# Altium PCB Swarm.PcbDoc
Units mil, origin at the board's own origin, x right, y up, seen from the top; angles counter-clockwise.
Board outline 3937.01 x 3937.01 mil, 2 copper layers (Top Layer, Bottom Layer); 20 components, 41 nets, 214 pads, 29 vias.
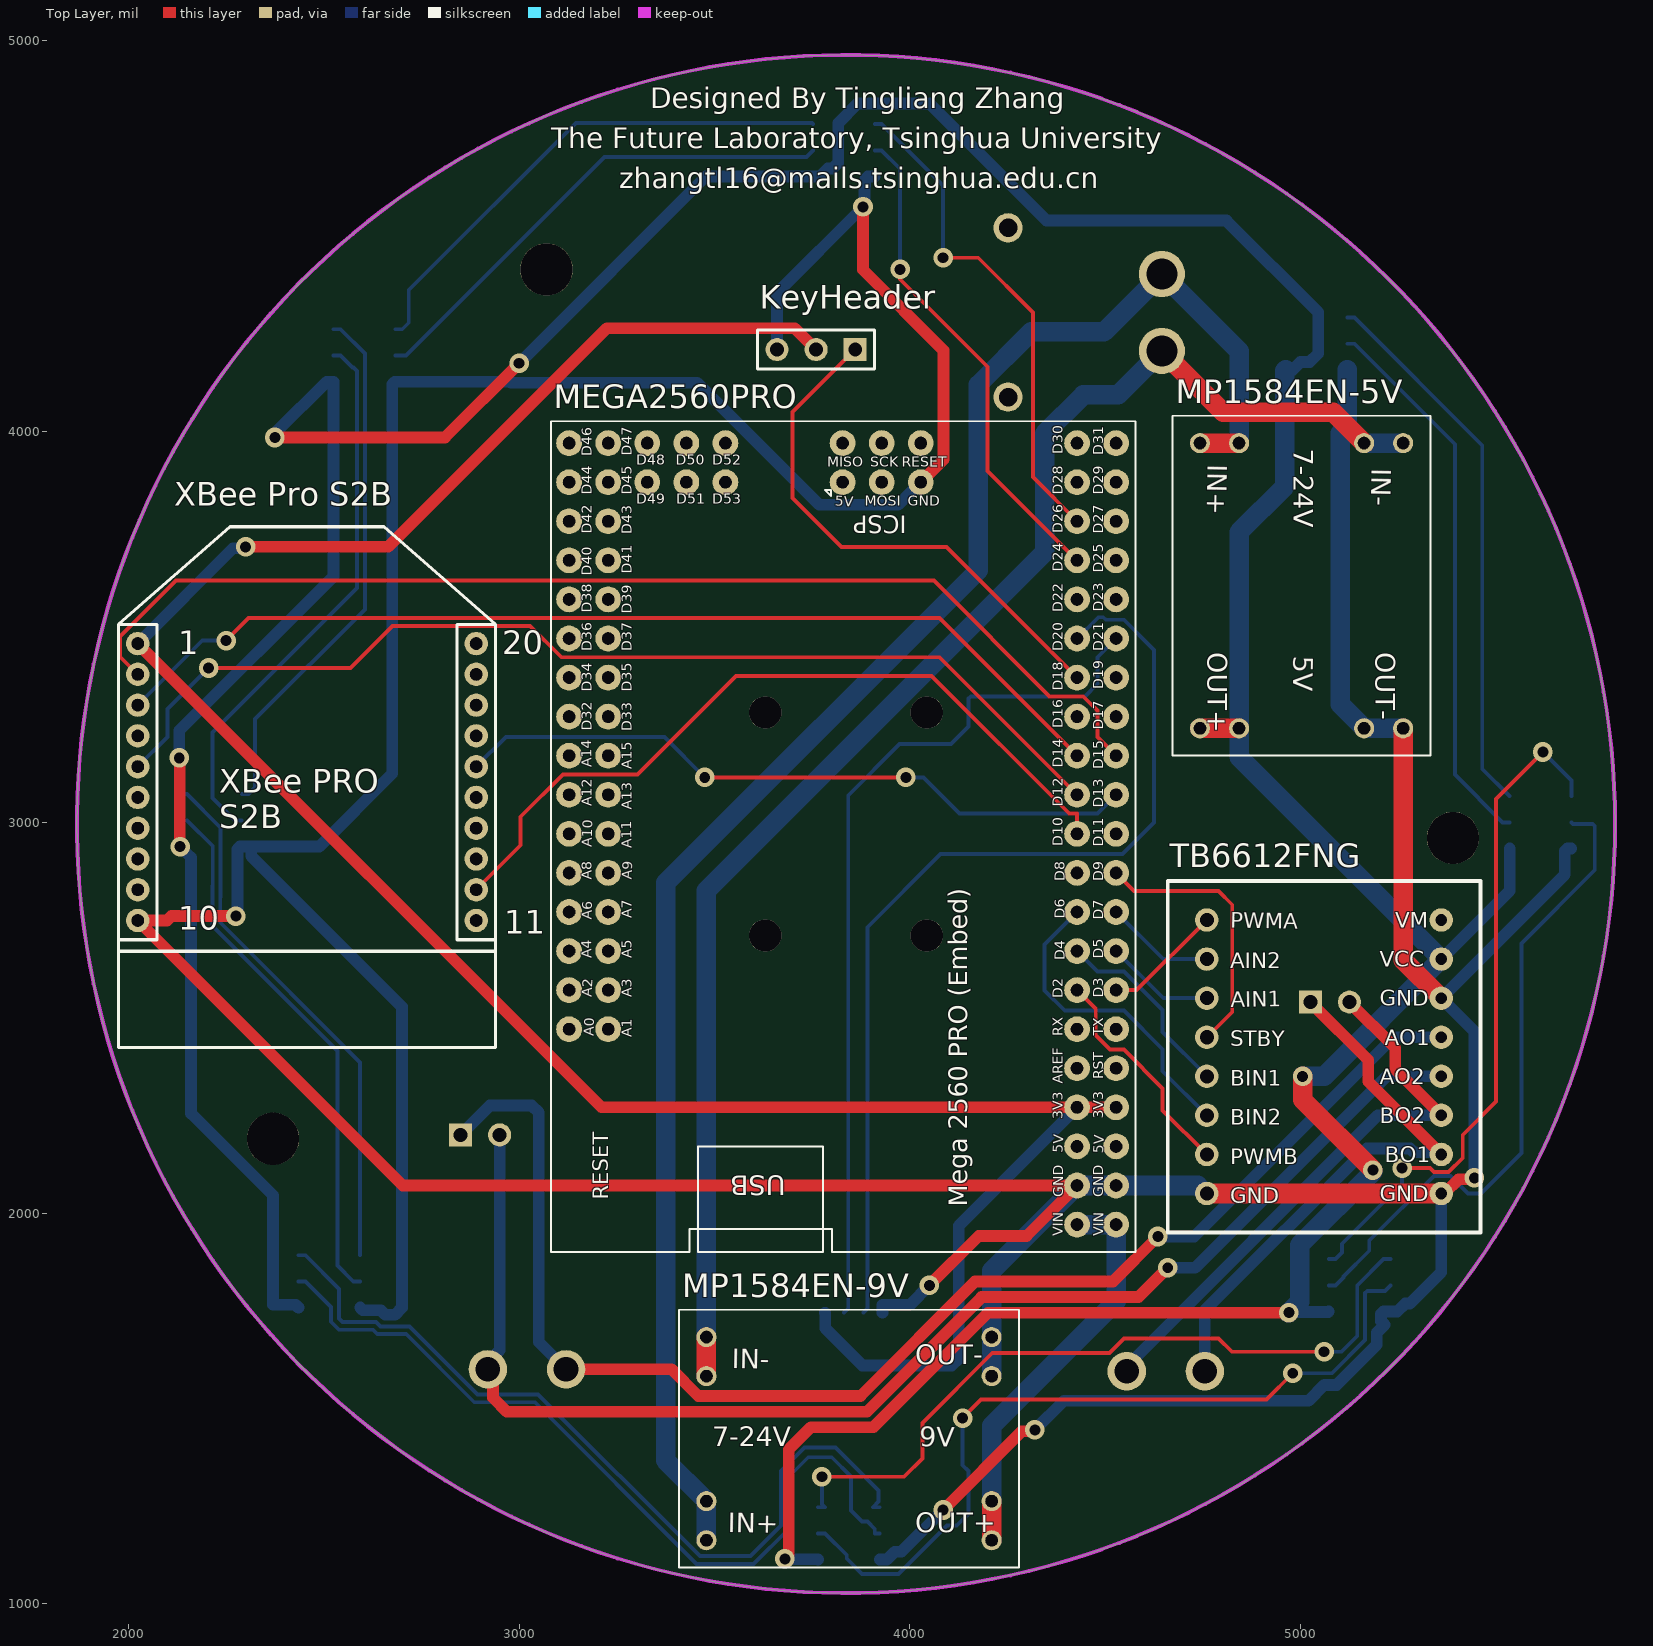
[diagram p0: Top Layer view]
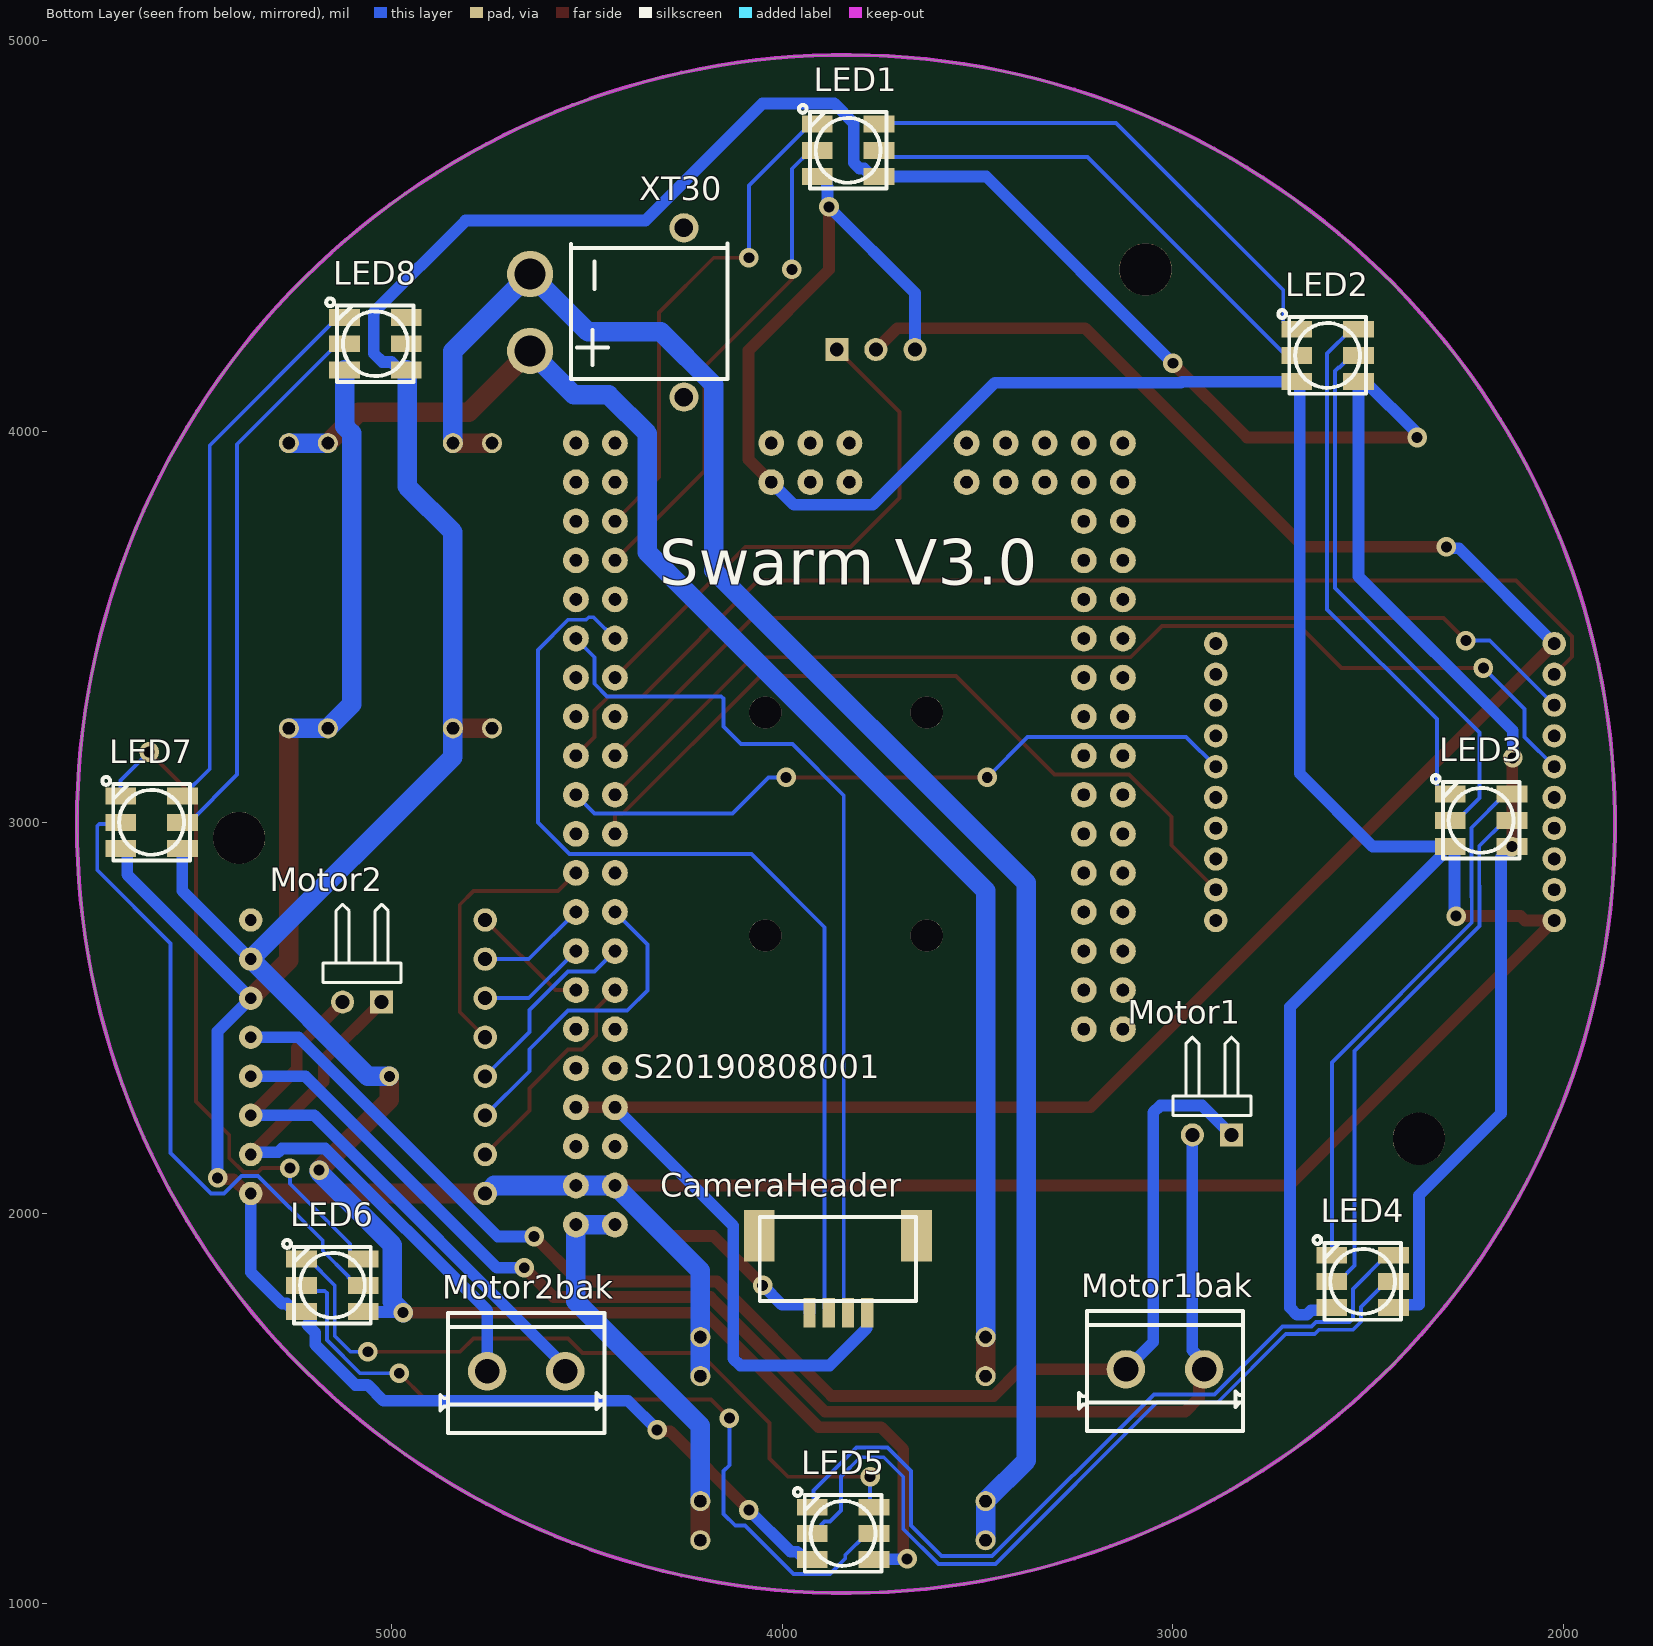
[diagram p1: Bottom Layer view, seen from below]

## Layer stack, top to bottom
Top Solder: solder mask 0.4, Solder Resist, Dk 3.5
Top Layer: signal copper 1.4
Dielectric 1: dielectric 12.6, FR-4, Dk 4.8
Bottom Layer: signal copper 1.4
Bottom Solder: solder mask 0.4, Solder Resist, Dk 3.5

## Board outline
1868.01,2995.74 cw(c3836.52,2995.74) 3836.52,4964.24 cw(c3836.52,2995.74) 5805.02,2995.74 cw(c3836.52,2995.74) 3836.52,1027.23 cw(c3836.52,2995.74)

## Design rules (kind name [scope] priority, off if disabled: settings)
Clearance [All] p1: gap=10 ignorepadtopadclearanceinfootprint=FALSE except(0: Arc-Hole Track-Hole SMDPad-Hole THPad-Hole Via-Hole Fill-Hole Poly-Hole Region-Hole Text-Hole)
PolygonConnect [All] p1: connectstyle=Relief reliefconductorwidth=10 reliefentries=4 polygonreliefangle="90 Angle" airgapwidth=10
RoutingVias [All] p1: holewidth=28 width=50 viastyle="Through Hole" minholewidth=28 minwidth=50 maxholewidth=28 maxwidth=50
SolderMaskExpansion [All] p1: expansion=4
Width [All] p1: maxlimit=50 minlimit=10 preferedwidth=10 minimp=50.000000 maximp=50.000000 favimp=50.000000
30 further rules are at their usual default settings.

## Components (designator, comment, footprint, x,y, rotation, side; value= is the part's Value field where it differs from the comment)
CameraHeader "CameraHeader" CameraHeader 3857.36,1890 r0 bottom
KeyHeader "Header 3" HDR1X3 3860,4210 r180 top
LED1 "APA1025050" APA102_5050 7831,7720 r180 bottom
LED2 "APA1025050" APA102_5050 6604,7195 r180 bottom
LED3 "APA1025050" APA102_5050 6211,6005 r180 bottom
LED4 "APA1025050" APA102_5050 6514,4825 r180 bottom
LED5 "APA1025050" APA102_5050 7844,4180 r180 bottom
LED6 "APA1025050" APA102_5050 9151,4815 r180 bottom
LED7 "APA1025050" APA102_5050 9614,6000 r180 bottom
LED8 "APA1025050" APA102_5050 9041,7225 r180 bottom
MEGA2560PRO "MEGA2560PROE" MEGA2560PRO 3836.52,2995.74 r90 top
Motor1 "Header 2H" HDR1X2H 2850,2200 r0 bottom
Motor1bak "DB126V-5.0-2P" CONN-TH_2PIN-V-PITCH5.00-L_JL126-50002G01 3020,1600 r180 bottom
Motor2 "Header 2H" HDR1X2H 5025,2540 r0 bottom
Motor2bak "DB126V-5.0-2P" CONN-TH_2PIN-V-PITCH5.00-L_JL126-50002G01 4655,1595 r180 bottom
MP1584EN-5V "MP1584EN非隔离降压" MP1584_DC 5000,3595 r270 top
MP1584EN-9V "MP1584EN非隔离降压" MP1584_DC 3855,1420 r0 top
TB6612FNG "TB6612FNG" TB6612FNG 5060,2400 r0 top
"XBee Pro S2B" "XBee Pro S2B" XBEE-1 2456.93,2670.08 r0 top
XT30 "xt30" "XT30 GONG" 4645,4305 r270 bottom

## Footprints (in the part's own frame and the unit in brackets; to place one, negate y for a bottom-side part, rotate by r counter-clockwise, add the part's x,y. Pads: shape width x height; smd on the part's side, far side on the other; paste and mask are expansions set on the pad)
APA102_5050 [mil]
  rect 78.7x43.3 smd: 1(4079,-3067) 2(4079,-3000) 3(4079,-2933) 4(3921,-2933) 5(3921,-3000) 6(3921,-3067)
  silkscreen extent 3874,-3098 4098,-2884
CameraHeader [mm]
  rect 2x3.35 smd: 0(-5.105,-1.317) 0(5.105,-1.317)
  rect 0.8x1.9 smd: 1(-1.905,3.683) 2(-0.655,3.683) 3(0.595,3.683) 4(1.845,3.683)
  silkscreen extent -5.08,-2.54 5.08,2.92
CONN-TH_2PIN-V-PITCH5.00-L_JL126-50002G01 [mm]
  round 2.5 hole 1.6: 1(-2.54,0) 2(2.54,0)
  silkscreen extent -5.59,-4 5.08,3.8
HDR1X2H [mm] "Connector; Header; 2 Position; Right Angle"
  rect 1.5x1.5 hole 0.9: 1(0,0)
  round 1.5 hole 0.9: 2(2.54,0)
  silkscreen extent -1.27,-6.35 3.81,-1.27
HDR1X3 [mm] "Connector; Header; 3 Position"
  rect 1.5x1.5 hole 0.9: 1(0,0)
  round 1.5 hole 0.9: 2(2.54,0) 3(5.08,0)
  silkscreen extent -1.27,-1.27 6.35,1.27
MEGA2560PRO [mil]
  round 66 hole 31.5 slot 31.7 at 0 deg: 3V3@1(-725.2,-691.34) 3V3@2(-725.2,-591.34) 5V@1(-825.2,-691.34) 5V@2(-825.2,-591.34) 5V@3(874.8,8.66) A0(-525.2,708.66) A1(-525.2,608.66) A2(-425.2,708.66) A3(-425.2,608.66) A4(-325.2,708.66) A5(-325.2,608.66) A6(-225.2,708.66) A7(-225.2,608.66) A8(-125.2,708.66) A9(-125.2,608.66) A10(-25.2,708.66) A11(-25.2,608.66) A12(74.8,708.66) A13(74.8,608.66) A14(174.8,708.66) A15(174.8,608.66) AREF(-625.2,-591.34) D2(-425.2,-591.34) D3(-425.2,-691.34) D4(-325.2,-591.34) D5(-325.2,-691.34) D6(-225.2,-591.34) D7(-225.2,-691.34) D8(-125.2,-591.34) D9(-125.2,-691.34) D10(-25.2,-591.34) D11(-25.2,-691.34) D12(74.8,-591.34) D13(74.8,-691.34) D14(174.8,-591.34) D15(174.8,-691.34) D16(274.8,-591.34) D17(274.8,-691.34) D18(374.8,-591.34) D19(374.8,-691.34) D20(474.8,-591.34) D21(474.8,-691.34) D22(574.8,-591.34) D23(574.8,-691.34) D24(674.8,-591.34) D25(674.8,-691.34) D26(774.8,-591.34) D27(774.8,-691.34) D28(874.8,-591.34) D29(874.8,-691.34) D30(974.8,-591.34) D31(974.8,-691.34) D32(274.8,708.66) D33(274.8,608.66) D34(374.8,708.66) D35(374.8,608.66) D36(474.8,708.66) D37(474.8,608.66) D38(574.8,708.66) D39(574.8,608.66) D40(674.8,708.66) D41(674.8,608.66) D42(774.8,708.66) D43(774.8,608.66) D44(874.8,708.66) D45(874.8,608.66) D46(974.8,708.66) D47(974.8,608.66) D48(974.8,508.66) D49(874.8,508.66) D50(974.8,408.66) D51(874.8,408.66) D52(974.8,308.66) D53(874.8,308.66) GND@1(-925.2,-691.34) GND@2(-925.2,-591.34) GND@3(874.8,-191.34) MISO(974.8,8.66) MOSI(874.8,-91.34) RESET(974.8,-191.34) RST(-625.2,-691.34) RX(-525.2,-591.34) SCK(974.8,-91.34) TX(-525.2,-691.34) VIN@1(-1025.19,-691.34) VIN@2(-1025.19,-591.34)
  silkscreen extent -1095,-741 1031,755
MP1584_DC [mil]
  round 51.5 hole 31.5 slot 31.7 at 0 deg: IN+(-375.67,-157.48) IN+@1(-375.67,-257.48) IN-(-375.67,262.52) IN-@1(-375.67,162.52) OUT+(354.33,-257.48) OUT+@1(354.33,-157.48) OUT-(354.33,262.52) OUT-@1(354.33,162.52)
  silkscreen extent -446,-327 424,333
TB6612FNG [mil]
  round 60 hole 36: 1(-300,350) 2(-300,250) 3(-300,150) 4(-300,50) 5(-300,-50) 6(-300,-150) 7(-300,-250) 8(-300,-350)
  round 60 hole 30: 9(300,-350) 10(300,-250) 11(300,-150) 12(300,-50) 13(300,50) 14(300,150) 15(300,250) 16(300,350)
  silkscreen extent -400,-450 400,450
XBEE-1 [mil]
  round 60 hole 31.5 slot 31.7 at 0 deg: 1(-433.07,787.4) 2(-433.07,708.66) 3(-433.07,629.92) 4(-433.07,551.18) 5(-433.07,472.44) 6(-433.07,393.7) 7(-433.07,314.96) 8(-433.07,236.22) 9(-433.07,157.48) 10(-433.07,78.74) 11(433.07,78.74) 12(433.07,157.48) 13(433.07,236.22) 14(433.07,314.96) 15(433.07,393.7) 16(433.07,472.44) 17(433.07,551.18) 18(433.07,629.92) 19(433.07,708.66) 20(433.07,787.4)
  silkscreen extent -482,-246 482,1087
"XT30 GONG" [mm]
  round 3 hole 2: 1(-2.5,0) 2(2.5,0)
  round 1.9 hole 1.2: 3(5.5,10) 4(-5.5,10)
  silkscreen extent -4.5,2.67 4.32,12.83

## Part data
CameraHeader: library part Component_1
KeyHeader: "Header, 3-Pin", LatestRevisionDate=17-Jul-2002, LatestRevisionNote="Re-released for DXP Platform.", Publisher="Altium Limited"
MEGA2560PRO: library part "MEGA2560PROE copy", Contributor=westcowboy, spicePre=M
Motor1 Motor2: "Header, 2-Pin, Right Angle", LatestRevisionDate=17-Jul-2002, LatestRevisionNote="Re-released for DXP Platform.", Publisher="Altium Limited"
Motor1bak Motor2bak: BOM_Manufacturer=DIBO, BOM_Manufacturer Part=DB126V-5.0-2P, BOM_Supplier=LCSC, BOM_Supplier Part=C395849, Contributor=LCSC, spicePre=U
"XBee Pro S2B": library part XBEE-1B1, Contributor=niudvb, spicePre=?
LED1 LED2 LED3 LED4 LED5 LED6 LED7 LED8: spicePre=U
MP1584EN-5V MP1584EN-9V: Contributor=zuwenz, spicePre=D
TB6612FNG: Contributor=Lwj.bf, sourceId=YsmgyP7pj, spicePre=U, timeStamp=1453691199
XT30: Contributor=Weiwww, spicePre=U

## Free pads (board coordinates)
  round 82.68 hole 82.68: 1(3629.82,2710.3) 1(3629.82,3281.17) 1(4043.21,2710.3) 1(4043.21,3281.17)
  round 133.86 hole 133.86: M3(2370,2190) M3(3070,4415) M3(5390,2960)

## Via types
v1: diameter 50, hole 28, Top Layer to Bottom Layer, 29 vias

## Nets (pads, with @x,y where several pads share a name; then routed paths per layer and width w, separated by ;. In a path a pad name is that pad's centre, name@x,y a point inside that pad or via, vN(x,y) a via of type N, cw(c..) or ccw(c..) an arc to the next point about the centre after c; other vN are vias at no path point)
+5: LED1.1 LED2.1 LED3.1 LED4.1 LED5.1 LED6.1 LED7.1 LED8.1 MP1584EN-5V.OUT+ MP1584EN-5V.OUT+@1 TB6612FNG.15 | length 11791.8
  Top Layer w30: v1(2130,3165) 2131,3164 2131,2939 v1(2132,2938) ; v1(2375,3985) 2810,3985 v1(3000,4175) ; v1(3680,1115) 3690,1125 3690,1395 3746.77,1451.77 3906.81,1451.77 4200.04,1745 v1(4970,1745)
  Top Layer w50: MP1584EN-5V.OUT+ 4842.52,3240.67 ; v1(5005,2350) 5005,2290 v1(5185,2110)
  Bottom Layer w30: v1(2130,3165) 2130,3235 2525,3630 LED2.1 2507.3,4128 2378.83,3999.53 2378.83,3988.83 v1(2375,3985) ; v1(2132,2938) 2160,2910 2160,2255 2370,2045 2370,1765 2428,1765 LED4.1 ; v1(3000,4175) 2999.92,4175.08 3477.85,4653 LED1.1 3769.7,4653 3790.05,4673.35 3801.71,4673.35 3816.35,4687.99 3816.35,4789.71 3866.64,4840 4050,4840 4349.82,4540.18 4810.17,4540.18 5045,4305.36 5045,4200 5023.35,4178.35 5000.05,4178.35 4979.7,4158 LED8.1 ; v1(3680,1115) 3681,1114 3764,1114 LED5.1 ; v1@4971.5,1746.5 5070.5,1746.5 LED6.1 ; TB6612FNG.15 5535,2825 LED7.1
  Bottom Layer w50: LED8.1 4960,4156 4960,3860 4842.52,3742.52 4842.52,3240.67 4842.81,3240.38 4842.81,3167.19 TB6612FNG.15 5060,2350 v1(5005,2350) ; v1(4970,1745) 4971.5,1746.5 4997.65,1772.65 4997.65,1918.15 5185,2105.5 v1(5185,2110)
AIN1: MEGA2560PRO.D5 TB6612FNG.3 | length 282.1
  Bottom Layer w10: MEGA2560PRO.D5 4648.39,2550 TB6612FNG.3
AIN2: MEGA2560PRO.D7 TB6612FNG.2 | length 282.1
  Bottom Layer w10: MEGA2560PRO.D7 4648.39,2650 TB6612FNG.2
AO1: Motor1.1 Motor1bak.1 TB6612FNG.13 | length 3573.4
  Top Layer w30: Motor1bak.1 3390.08,1600 3458.31,1531.77 3873.67,1531.77 4166.9,1825 4520,1825 v1(4635,1940)
  Bottom Layer w30: Motor1.1 2925,2275 3032.43,2275 3050,2257.43 3050,1670 Motor1bak.1 ; v1(4635,1940) 4727.78,1940 5237.78,2450 TB6612FNG.13
AO2: Motor1.2 Motor1bak.2 TB6612FNG.12 | length 3487.9
  Top Layer w30: Motor1bak.2 2933.09,1586.91 2933.09,1526.91 2968.23,1491.77 3890.24,1491.77 4183.47,1785 4585,1785 v1(4660,1860)
  Bottom Layer w30: Motor1bak.2 2920,1618.52 2950,1648.52 Motor1.2 ; v1(4660,1860) 4730,1860 5220,2350 TB6612FNG.12
BIN1: MEGA2560PRO.D4 TB6612FNG.5 | length 497.9
  Bottom Layer w10: MEGA2560PRO.D4 4479.86,2618.54 4547.74,2618.54 4647.09,2519.19 4647.09,2462.91 TB6612FNG.5
BIN2: MEGA2560PRO.D6 TB6612FNG.6 | length 815.4
  Bottom Layer w10: MEGA2560PRO.D6 4345,2687.68 4345,2570 4396.46,2518.54 4547.74,2518.54 4647.09,2419.19 4647.09,2362.91 TB6612FNG.6
BO1: Motor2.1 Motor2bak.1 TB6612FNG.10 | length 1467.3
  Top Layer w30: Motor2.1 5173.25,2391.75 5173.25,2336.75 TB6612FNG.10
  Bottom Layer w30: Motor2bak.1 4755,1750.71 5169.29,2165 5280.71,2165 5289.97,2155.74 5354.26,2155.74 TB6612FNG.10
BO2: Motor2.2 Motor2bak.2 TB6612FNG.11 | length 1470.8
  Top Layer w30: Motor2.2 5242.41,2422.59 5242.41,2367.59 TB6612FNG.11
  Bottom Layer w30: Motor2bak.2 4555,1607.28 5197.72,2250 TB6612FNG.11
GND: "XBee Pro S2B.10" CameraHeader.4 KeyHeader.3 LED1.6 LED2.6 LED3.6 LED4.6 LED5.6 LED6.6 LED7.6 LED8.6 MEGA2560PRO.GND@1 MEGA2560PRO.GND@2 MEGA2560PRO.GND@3 MP1584EN-5V.OUT- MP1584EN-5V.OUT-@1 MP1584EN-9V.OUT- MP1584EN-9V.OUT-@1 TB6612FNG.8 TB6612FNG.9 TB6612FNG.14 | length 15990.9
  Top Layer w30: v1(2275,2760) 2110.04,2760 2098.86,2748.82 2023.86,2748.82 2702.14,2070.54 4427.86,2070.54 4298.56,1941.24 4176.24,1941.24 v1(4050,1815) ; v1(3880,4575) 3880,4414.29 4085.86,4208.43 4085.86,3928.54 4027.86,3870.54 ; v1(4085,1240) 4286.17,1441.17 4316.17,1441.17 v1(4320,1445) ; TB6612FNG.9 5368.12,2050 5404.29,2086.17 5441.17,2086.17 v1(5445,2090)
  Top Layer w50: TB6612FNG.8 TB6612FNG.9 ; MP1584EN-5V.OUT- 5262.52,2647.48 TB6612FNG.14
  Bottom Layer w30: v1(2275,2760) 2278.83,2763.83 2278.83,2931.35 2285.48,2938 LED3.6 LED3.6@2307.7,2938 ; LED4.6 2599.65,1751.35 2646.22,1751.35 2657.57,1740 2682.43,1740 2700,1757.57 2700,2528 2314.35,2913.65 2314.35,2931.35 LED3.6@2307.7,2938 ; KeyHeader.3 3660,4355 v1(3880,4575) 3883.83,4578.83 3883.83,4626.83 3885.65,4628.65 3885.65,4646.35 3892.3,4653 LED1.6 ; LED5.6 3940.7,1113 3961.05,1133.35 3978.35,1133.35 v1(4085,1240) ; CameraHeader.4 3930,1764.75 3930.75,1765.5 4000.5,1765.5 v1(4050,1815) ; 4027.86,3870.54 3969.86,3812.54 3767.88,3812.54 3455.42,4125 2979.29,4125 2976.29,4128 LED2.6 2681.65,4128 2675,4121.35 2675,3125 2488,2938 LED3.6@2307.7,2938 ; v1(4320,1445) 4394.41,1519.41 5020.42,1519.41 5061.01,1560 5092.43,1560 5195,1662.57 5195,1693.99 5215,1713.99 5205.65,1723.34 5205.65,1741.35 5212.3,1748 LED6.6 5247.7,1748 5268.05,1768.35 5279.71,1768.35 5360,1848.64 TB6612FNG.9 ; v1(5445,2090) 5445,2465 TB6612FNG.14 5676.35,2866.35 5676.35,2926.35 5683,2933 LED7.6
  Bottom Layer w50: 4209.33,1582.52 MP1584EN-9V.OUT- 4209.33,1852.01 4427.86,2070.54 4527.86,2070.54 4736.76,2070.54 4757.29,2050 TB6612FNG.8 ; LED8.6 5120,4014.06 5101.77,3995.83 5101.77,3301.83 5162.52,3241.08 5162.52,3240.67 MP1584EN-5V.OUT-
Key: KeyHeader.1 MEGA2560PRO.D18 | length 1364.4
  Top Layer w10: KeyHeader.1 3700,4050 3700,3830 3825,3705 4093.39,3705 MEGA2560PRO.D18
MOSI: LED1.4 MEGA2560PRO.D26 | length 1294.1
  Top Layer w10: v1(4085,4445) 4175,4445 4315,4305 4315,3883.39 MEGA2560PRO.D26
  Bottom Layer w10: LED1.4 3927.7,4787 4085,4629.7 v1(4085,4445)
NetLED1_2: LED1.2 LED2.5 | length 1286.5
  Bottom Layer w10: LED2.5 2710,4195 3218.35,4703.35 3735.35,4703.35 LED1.2
NetLED1_3: LED1.3 LED2.4 | length 1338
  Bottom Layer w10: LED2.4 2700.7,4262 2717.35,4278.65 2717.35,4362.35 3145,4790 3749,4790 LED1.3
NetLED2_2: LED2.2 LED3.5 | length 1421.3
  Bottom Layer w10: LED3.5 2272.3,3005 2215,3062.3 2215,3230 2585,3600 2585,4155 2575.79,4164.21 2573.49,4164.21 2542.7,4195 LED2.2
NetLED2_3: LED2.3 LED3.4 | length 1374.4
  Bottom Layer w10: LED3.4 2307.7,3072 2324.35,3088.65 2324.35,3264.35 2605,3545 2605,4199.7 2542.7,4262 LED2.3
NetLED3_2: LED3.2 LED4.5 | length 1392.2
  Bottom Layer w10: LED3.2 2149.7,3005 2215.65,2939.05 2215.65,2837.42 2215,2836.77 2215,2735.15 2535,2415.15 2535,1865.3 2575.3,1825 LED4.5
NetLED3_3: LED3.3 LED4.4 | length 1381.9
  Bottom Layer w10: LED3.3 2149.7,3072 2235.65,2986.05 2235.65,2809.22 2235,2808.57 2235,2743.43 2593,2385.43 LED4.4
NetLED4_2: LED4.2 LED5.5 | length 2139.2
  Bottom Layer w10: LED4.2 2452.7,1825 2518.65,1759.05 2518.65,1721.85 2539.15,1701.35 2625.51,1701.35 2636.86,1690 2710.91,1690 2885.12,1515.79 3040.15,1515.79 3454.17,1101.77 3600.05,1101.77 3690,1191.72 3690,1325 3740,1375 3800,1375 3849.61,1325.39 3849.61,1238.18 3877.44,1210.35 3891.22,1210.35 3910,1191.57 3910,1180 LED5.5
NetLED4_3: LED4.3 LED5.4 | length 2158.1
  Bottom Layer w10: LED4.3 2452.7,1892 2538.65,1806.05 2538.65,1730.14 2547.44,1721.35 2633.8,1721.35 2645.15,1710 2719.19,1710 2893.4,1535.79 3048.43,1535.79 3462.45,1121.77 3591.77,1121.77 3670,1200 3670,1340 3730,1400 3810,1400 3920,1290 3920,1261.7 3905.3,1247 LED5.4
NetLED5_2: LED5.2 LED6.5 | length 2054.1
  Top Layer w10: v1(4135,1475) 4182.5,1522.5 4912.5,1522.5 v1(4980,1590)
  Bottom Layer w10: LED5.2 3782.7,1180 3838.39,1124.31 3838.39,1115.39 3877.44,1076.35 3971.35,1076.35 4095,1200 4120,1200 4150,1230 4150,1339.59 4135,1354.59 v1(4135,1475) ; v1(4980,1590) 5080,1590 5165,1675 5165,1795 5170.86,1800.86 5215.86,1800.86 LED6.5
NetLED5_3: LED5.3 LED6.4 | length 1942.1
  Top Layer w10: v1(3775,1325) 3985,1325 4031.8,1371.8 4031.8,1462.62 4210.95,1641.77 4510.96,1641.77 4548.4,1679.21 4789.88,1679.21 4824.09,1645 v1(5060,1645)
  Bottom Layer w10: LED5.3 3782.7,1247 3775,1254.7 v1(3775,1325) ; v1(5060,1645) 5105,1645 5145,1685 5145,1814.7 5212.3,1882 LED6.4
NetLED6_2: LED6.2 LED7.5 | length 1665.9
  Bottom Layer w10: LED6.2 5089.7,1815 5109.79,1835.09 5109.79,1837.58 5175.65,1903.44 5175.65,1929.29 5341.36,2095 5383.43,2095 5428.43,2050 5461.57,2050 5565,2153.43 5565,2690 5753,2878 5753,2990.37 5747.35,2996.02 5696.98,2996.02 LED7.5
NetLED6_3: LED6.3 LED7.4 | length 1762.2
  Top Layer w10: v1(5260,2115) 5331.36,2115 5341.36,2105 5378.64,2105 5415,2141.36 5415,2200 5500,2285 5500,3060 v1(5620,3180)
  Bottom Layer w10: LED6.3 5089.7,1882 5106.35,1898.65 5106.35,1921.35 5260,2075 v1(5260,2115) ; v1(5620,3180) 5693,3107 LED7.4
NetLED7_2: LED7.2 LED8.5 | length 1417.6
  Bottom Layer w10: LED8.5 5137.7,4225 5395,3967.7 5395,3122.3 5517.3,3000 LED7.2
NetLED7_3: LED7.3 LED8.4 | length 1407.3
  Bottom Layer w10: LED8.4 5137.7,4292 5465,3964.7 5465,3137 LED7.3
NetMP1584EN-5V_IN+: MP1584EN-5V.IN+ MP1584EN-5V.IN+@1 MP1584EN-9V.IN+ MP1584EN-9V.IN+@1 XT30.1 | length 4534
  Top Layer w50: 4742.52,3970.67 MP1584EN-5V.IN+
  Bottom Layer w50: 3479.33,1162.52 MP1584EN-9V.IN+ 3375,1366.85 3375,2845 4175,3645 4175,4120 4310.19,4255.19 4496.77,4255.19 XT30.1 4842.52,4205.9 MP1584EN-5V.IN+
NetMP1584EN-5V_IN-: MP1584EN-5V.IN- MP1584EN-5V.IN-@1 MP1584EN-9V.IN- MP1584EN-9V.IN-@1 XT30.2 | length 3873.9
  Top Layer w50: 3479.33,1582.52 MP1584EN-9V.IN- ; XT30.2 4801.57,4050 5083.19,4050 5162.52,3970.67
  Bottom Layer w50: MP1584EN-9V.IN- 3479.33,2825.25 4345,3690.92 4345,3995 4444.27,4094.27 4532.7,4094.27 XT30.2 ; 5162.52,3970.67 MP1584EN-5V.IN-
PWMA: MEGA2560PRO.D3 TB6612FNG.1 | length 306.5
  Top Layer w10: MEGA2560PRO.D3 4580.54,2570.54 TB6612FNG.1
PWMB: MEGA2560PRO.D2 TB6612FNG.7 | length 579.1
  Top Layer w10: MEGA2560PRO.D2 4475.86,2522.54 4475.86,2454.65 4511.98,2418.54 4547.74,2418.54 4647.09,2319.19 4647.09,2262.91 TB6612FNG.7
SCK: LED1.5 MEGA2560PRO.D24 | length 1274.3
  Top Layer w10: v1(3975,4415) 3975,4390 4198.9,4166.1 4198.9,3899.5 MEGA2560PRO.D24
  Bottom Layer w10: LED1.5 3927.7,4720 3975,4672.7 v1(3975,4415)
STBY: MEGA2560PRO.D9 TB6612FNG.4 | length 696.9
  Top Layer w10: MEGA2560PRO.D9 4573.91,2824.48 4789.66,2824.48 4825,2789.14 4825,2515 TB6612FNG.4
VCC: "XBee Pro S2B.1" CameraHeader.1 KeyHeader.2 MEGA2560PRO.3V3@1 MEGA2560PRO.3V3@2 | length 6285.9
  Top Layer w30: 2023.86,3457.48 3210.8,2270.54 4427.86,2270.54 4527.86,2270.54 ; v1(2300,3705) 2665,3705 3224.53,4264.53 3705.47,4264.53 KeyHeader.2
  Bottom Layer w30: 2023.86,3457.48 2267.55,3701.17 2296.17,3701.17 v1(2300,3705) ; CameraHeader.1 3783.11,1744.25 3783.11,1704.96 3878.07,1610 4107.43,1610 4125,1627.57 4125,1967.68 4427.86,2270.54
VIN: MEGA2560PRO.VIN@1 MEGA2560PRO.VIN@2 MP1584EN-9V.OUT+ MP1584EN-9V.OUT+@1 | length 1040
  Top Layer w50: MP1584EN-9V.OUT+ 4209.33,1262.52
  Bottom Layer w50: 4209.33,1262.52 4209.33,1455.31 4527.86,1773.84 4527.86,1970.55 4427.86,1970.55
W_SCK: CameraHeader.2 MEGA2560PRO.D21 | length 2262
  Bottom Layer w10: CameraHeader.2 3842.32,1755.75 3842.32,3068.89 3973.43,3200 4105,3200 4150,3245 4150,3316.68 4155.86,3322.54 4447.74,3322.54 4479.86,3354.65 4479.86,3422.54 MEGA2560PRO.D21
W_SDIO: CameraHeader.3 MEGA2560PRO.D20 | length 2531.4
  Bottom Layer w10: CameraHeader.3 3891.54,1755.75 3891.54,2731.54 4078.54,2918.54 4543.74,2918.54 4625,2999.8 4625,3441.28 4547.74,3518.54 4501.46,3518.54 4495,3525 4482.32,3525 MEGA2560PRO.D20
XB_CTS: "XBee Pro S2B.12" MEGA2560PRO.D10 | length 2005.4
  Top Layer w10: 2890,2827.56 3003.77,2941.33 3003.77,3014.33 3111.98,3122.54 3302.54,3122.54 3555,3375 4055.51,3375 4407.98,3022.54 4427.86,3022.54 MEGA2560PRO.D10
XB_DIN: "XBee Pro S2B.3" MEGA2560PRO.D14 | length 2641.9
  Top Layer w10: v1(2250,3465) 2307.48,3522.48 4075.91,3522.48 MEGA2560PRO.D14
  Bottom Layer w10: 2023.86,3300 2188.86,3465 v1(2250,3465)
XB_DO: "XBee Pro S2B.2" MEGA2560PRO.D15 | length 2949.3
  Top Layer w10: 2023.86,3378.74 1978.86,3423.74 1978.86,3476.12 2121.28,3618.54 4061.46,3618.54 4357.46,3322.54 4443.74,3322.54 4479.86,3286.42 4479.86,3218.54 MEGA2560PRO.D15
XB_rest: "XBee Pro S2B.5" MEGA2560PRO.D12 | length 2773.8
  Top Layer w10: v1(2205,3395) 2568.19,3395 2675.67,3502.48 3028.03,3502.48 3107.98,3422.54 4075.86,3422.54 MEGA2560PRO.D12
  Bottom Layer w10: 2023.86,3142.52 2100,3218.66 2100,3290 v1(2205,3395)
XB_RTS: "XBee Pro S2B.16" MEGA2560PRO.D13 | length 1770.4
  Top Layer w10: v1(3475,3115) v1(3990,3115)
  Bottom Layer w10: 2890,3142.52 2966.02,3218.54 3371.46,3218.54 v1(3475,3115) ; v1(3990,3115) 4035,3115 4127.46,3022.54 4479.86,3022.54 MEGA2560PRO.D13
pads on no net: "XBee Pro S2B.4" "XBee Pro S2B.6" "XBee Pro S2B.7" "XBee Pro S2B.8" "XBee Pro S2B.9" "XBee Pro S2B.11" "XBee Pro S2B.13" "XBee Pro S2B.14" "XBee Pro S2B.15" "XBee Pro S2B.17" "XBee Pro S2B.18" "XBee Pro S2B.19" "XBee Pro S2B.20" CameraHeader.0 LED8.2 LED8.3 MEGA2560PRO.5V@1 MEGA2560PRO.5V@2 MEGA2560PRO.5V@3 MEGA2560PRO.A0 MEGA2560PRO.A1 MEGA2560PRO.A2 MEGA2560PRO.A3 MEGA2560PRO.A4 MEGA2560PRO.A5 MEGA2560PRO.A6 MEGA2560PRO.A7 MEGA2560PRO.A8 MEGA2560PRO.A9 MEGA2560PRO.A10 MEGA2560PRO.A11 MEGA2560PRO.A12 MEGA2560PRO.A13 MEGA2560PRO.A14 MEGA2560PRO.A15 MEGA2560PRO.AREF MEGA2560PRO.D8 MEGA2560PRO.D11 MEGA2560PRO.D16 MEGA2560PRO.D17 MEGA2560PRO.D19 MEGA2560PRO.D22 MEGA2560PRO.D23 MEGA2560PRO.D25 MEGA2560PRO.D27 MEGA2560PRO.D28 MEGA2560PRO.D29 MEGA2560PRO.D30 MEGA2560PRO.D31 MEGA2560PRO.D32 MEGA2560PRO.D33 MEGA2560PRO.D34 MEGA2560PRO.D35 MEGA2560PRO.D36 MEGA2560PRO.D37 MEGA2560PRO.D38 MEGA2560PRO.D39 MEGA2560PRO.D40 MEGA2560PRO.D41 MEGA2560PRO.D42 MEGA2560PRO.D43 MEGA2560PRO.D44 MEGA2560PRO.D45 MEGA2560PRO.D46 MEGA2560PRO.D47 MEGA2560PRO.D48 MEGA2560PRO.D49 MEGA2560PRO.D50 MEGA2560PRO.D51 MEGA2560PRO.D52 MEGA2560PRO.D53 MEGA2560PRO.MISO MEGA2560PRO.MOSI MEGA2560PRO.RESET MEGA2560PRO.RST MEGA2560PRO.RX MEGA2560PRO.SCK MEGA2560PRO.TX TB6612FNG.16 XT30.3 XT30.4

## Keep-outs
Keep-Out Layer:
  circle w10: c3836.52,2995.74 r1968.5

## Silkscreen, mask and mechanical layers (free items; w line width, h text height)
Top Overlay:
  text "Designed By Tingliang Zhang" at 3335,4810 h90
  text "The Future Laboratory, Tsinghua University" at 3082.47,4707.48 h90
  text "zhangtl16@mails.tsinghua.edu.cn" at 3256.17,4605 h90
Bottom Overlay:
  text "Swarm V3.0" at 4315,3570 h200
  text "S20190808001" at 4380,2345 h60

## Text inside footprints (layer, text, board x,y; h text height)
MEGA2560PRO: Top Overlay "USB" at 3682.86,2095.54 h50 r180; Top Overlay "5V" at 3808.25,3810.67 h26 r357; Top Overlay "MOSI" at 3883.93,3810.66 h26; Top Overlay "GND" at 3993.93,3810.66 h26; Top Overlay "RESET" at 3978.93,3910.66 h26; Top Overlay "SCK" at 3898.93,3910.66 h26; Top Overlay "MISO" at 3788.93,3910.66 h26; Top Overlay "Mega 2560 PRO (Embed)" at 4146.52,2015.74 h47.24 r90; Top Overlay "3V3" at 4391.56,2239.71 h26 r90; Top Overlay "GND" at 4391.96,2040.66 h26 r90; Top Overlay "5V" at 4391.41,2153.46 h26 r87; Top Overlay "VIN" at 4391.43,1940.27 h26 r89; Top Overlay "RESET" at 3227.65,2034.22 h39.37 r90; Top Overlay "ICSP" at 3991.42,3784.62 h44.62 r180; Top Overlay "A0" at 3190.77,2452.53 h26 r88; Top Overlay "A1" at 3288.2,2450.35 h26 r90; Top Overlay "A2" at 3185.76,2552.46 h26 r87; Top Overlay "A3" at 3288.2,2552.46 h26 r90; Top Overlay "A4" at 3185.65,2652.54 h26 r91; Top Overlay "A5" at 3288.07,2652.2 h26 r90; Top Overlay "A7" at 3288.07,2754.39 h26 r90; Top Overlay "A6" at 3185.77,2751.07 h26 r88; Top Overlay "A8" at 3185.78,2853.62 h26 r90; Top Overlay "A9" at 3288.18,2853.05 h26 r87; Top Overlay "D45" at 3288.07,3838.55 h26 r90; Top Overlay "D44" at 3185.65,3838.42 h26 r90; Top Overlay "A13" at 3288.2,3032.03 h26 r90; Top Overlay "A15" at 3288.2,3135.81 h26 r90; Top Overlay "D35" at 3288.2,3334.53 h26 r90; Top Overlay "D37" at 3288.2,3437.99 h26 r90; Top Overlay "D39" at 3288.2,3534.43 h26 r90; Top Overlay "D41" at 3288.2,3635.75 h26 r90; Top Overlay "D43" at 3288.2,3737.8 h26 r90; Top Overlay "A12" at 3185.78,3041.79 h26 r90; Top Overlay "A14" at 3185.78,3140.98 h26 r91; Top Overlay "D34" at 3185.78,3334.46 h26 r90; Top Overlay "D36" at 3185.78,3438.45 h26 r90; Top Overlay "D38" at 3185.78,3536.98 h26 r90; Top Overlay "D40" at 3185.78,3631.53 h26 r90; Top Overlay "D42" at 3185.78,3738.64 h26 r90; Top Overlay "A11" at 3288.2,2933.72 h26 r91; Top Overlay "D33" at 3288.2,3233.12 h26 r90; Top Overlay "D47" at 3288.07,3938.35 h26 r90; Top Overlay "A10" at 3185.77,2935.88 h26 r88; Top Overlay "D32" at 3185.78,3234.68 h26 r90; Top Overlay "D46" at 3185.78,3936.87 h26 r90; Top Overlay "D49" at 3300.13,3815.66 h26; Top Overlay "D51" at 3401.6,3815.66 h26; Top Overlay "D48" at 3300.13,3914.87 h26; Top Overlay "D50" at 3401.38,3914.87 h26; Top Overlay "D53" at 3493.93,3815.66 h26; Top Overlay "D52" at 3493.93,3914.87 h26; Top Overlay "D4" at 4396.43,2647.44 h26 r90; Top Overlay "D6" at 4396.56,2752.91 h26 r90; Top Overlay "AREF" at 4391.43,2331.06 h26 r90; Top Overlay "RX" at 4391.43,2452.44 h26 r90; Top Overlay "D2" at 4391.56,2549.52 h26 r90; Top Overlay "D8" at 4396.56,2848.68 h26 r90; Top Overlay "D10" at 4391.56,2938.44 h26 r90; Top Overlay "D12" at 4391.56,3040.17 h26 r90; Top Overlay "D16" at 4391.56,3240.7 h26 r90; Top Overlay "D20" at 4391.56,3438.46 h26 r90; Top Overlay "D22" at 4391.56,3538.26 h26 r90; Top Overlay "D26" at 4391.56,3739.83 h26 r90; Top Overlay "D28" at 4391.56,3838.74 h26 r90; Top Overlay "D18" at 4391.56,3336.58 h26 r90; Top Overlay "D24" at 4391.56,3641.03 h26 r90; Top Overlay "D30" at 4391.56,3942.14 h26 r90; Top Overlay "D14" at 4391.56,3139.6 h26 r90; Top Overlay "VIN" at 4494.98,1940.24 h26 r89; Top Overlay "D7" at 4494.98,2750.11 h26 r90; Top Overlay "D15" at 4495.12,3136.25 h26 r90; Top Overlay "D23" at 4495.12,3539.12 h26 r90; Top Overlay "D31" at 4495.12,3940.09 h26 r90; Top Overlay "GND" at 4495.51,2039.89 h26 r90; Top Overlay "5V" at 4494.96,2151.49 h26 r87; Top Overlay "TX" at 4494.98,2453.89 h26 r90; Top Overlay "D3" at 4495.12,2551.4 h26 r90; Top Overlay "RST" at 4495.51,2342.9 h26 r90; Top Overlay "D5" at 4494.98,2650.3 h26 r90; Top Overlay "D9" at 4495.12,2849.41 h26 r90; Top Overlay "D11" at 4495.12,2937.91 h26 r90; Top Overlay "D13" at 4495.12,3036.95 h26 r90; Top Overlay "D19" at 4495.12,3340.78 h26 r90; Top Overlay "D21" at 4495.12,3437.79 h26 r90; Top Overlay "D25" at 4495.12,3639.16 h26 r90; Top Overlay "D27" at 4495.12,3739.1 h26 r90; Top Overlay "3V3" at 4495.12,2240.79 h26 r90; Top Overlay "D17" at 4495.12,3237.15 h26 r90; Top Overlay "D29" at 4495.12,3838.47 h26 r90
MP1584EN-5V: Top Overlay "5V" at 4982.52,3426.11 h50 r269; Top Overlay "7-24V" at 4982.52,3955.67 h50 r270; Top Overlay "IN-" at 5182.52,3906.11 h50 r269; Top Overlay "IN+" at 4762.52,3916.11 h50 r269; Top Overlay "OUT+" at 4762.52,3435.67 h50 r270; Top Overlay "OUT-" at 5192.52,3435.67 h50 r270
MP1584EN-9V: Top Overlay "9V" at 4023.89,1402.52 h50 r359; Top Overlay "7-24V" at 3494.33,1402.52 h50; Top Overlay "IN-" at 3543.89,1602.52 h50 r359; Top Overlay "IN+" at 3533.89,1182.52 h50 r359; Top Overlay "OUT+" at 4014.33,1182.52 h50; Top Overlay "OUT-" at 4014.33,1612.52 h50
TB6612FNG: Top Overlay "VCC" at 5202.7,2630 h40; Top Overlay "AO1" at 5216.03,2430 h40; Top Overlay "AO2" at 5202.7,2330 h40; Top Overlay "VM" at 5242.69,2730 h40; Top Overlay "GND" at 5202.7,2030 h40; Top Overlay "GND" at 4820,2025 h40; Top Overlay "PWMB" at 4820,2125.33 h40; Top Overlay "BIN2" at 4820,2225.66 h40; Top Overlay "BIN1" at 4820,2325.99 h40; Top Overlay "STBY" at 4820,2426.32 h40; Top Overlay "AIN1" at 4820.84,2526.78 h40 r1; Top Overlay "AIN2" at 4820,2626.97 h40; Top Overlay "PWMA" at 4820.14,2730 h40 r359; Top Overlay "GND" at 5202.7,2530 h40; Top Overlay "BO2" at 5202.7,2230 h40; Top Overlay "BO1" at 5216.03,2130 h40
"XBee Pro S2B": Top Overlay "XBee PRO / S2B" at 2231.93,2985.08 h60; Top Overlay "10" at 2126.93,2725.08 h60; Top Overlay "1" at 2126.93,3430.08 h60; Top Overlay "11" at 2961.93,2715.08 h60; Top Overlay "20" at 2956.93,3430.08 h60